# Altium PCB Board.PcbDoc
Units mil, origin at the board's own origin, x right, y up, seen from the top; angles counter-clockwise.
Board outline 1850.39 x 1909.45 mil, 4 copper layers (Top Layer, GND Plane 1, GND Plane 2, Bottom Layer), stack 23.756 mil thick; 77 components, 59 nets, 282 pads, 180 vias.
Unrouted connection lines stored in the file: 9.
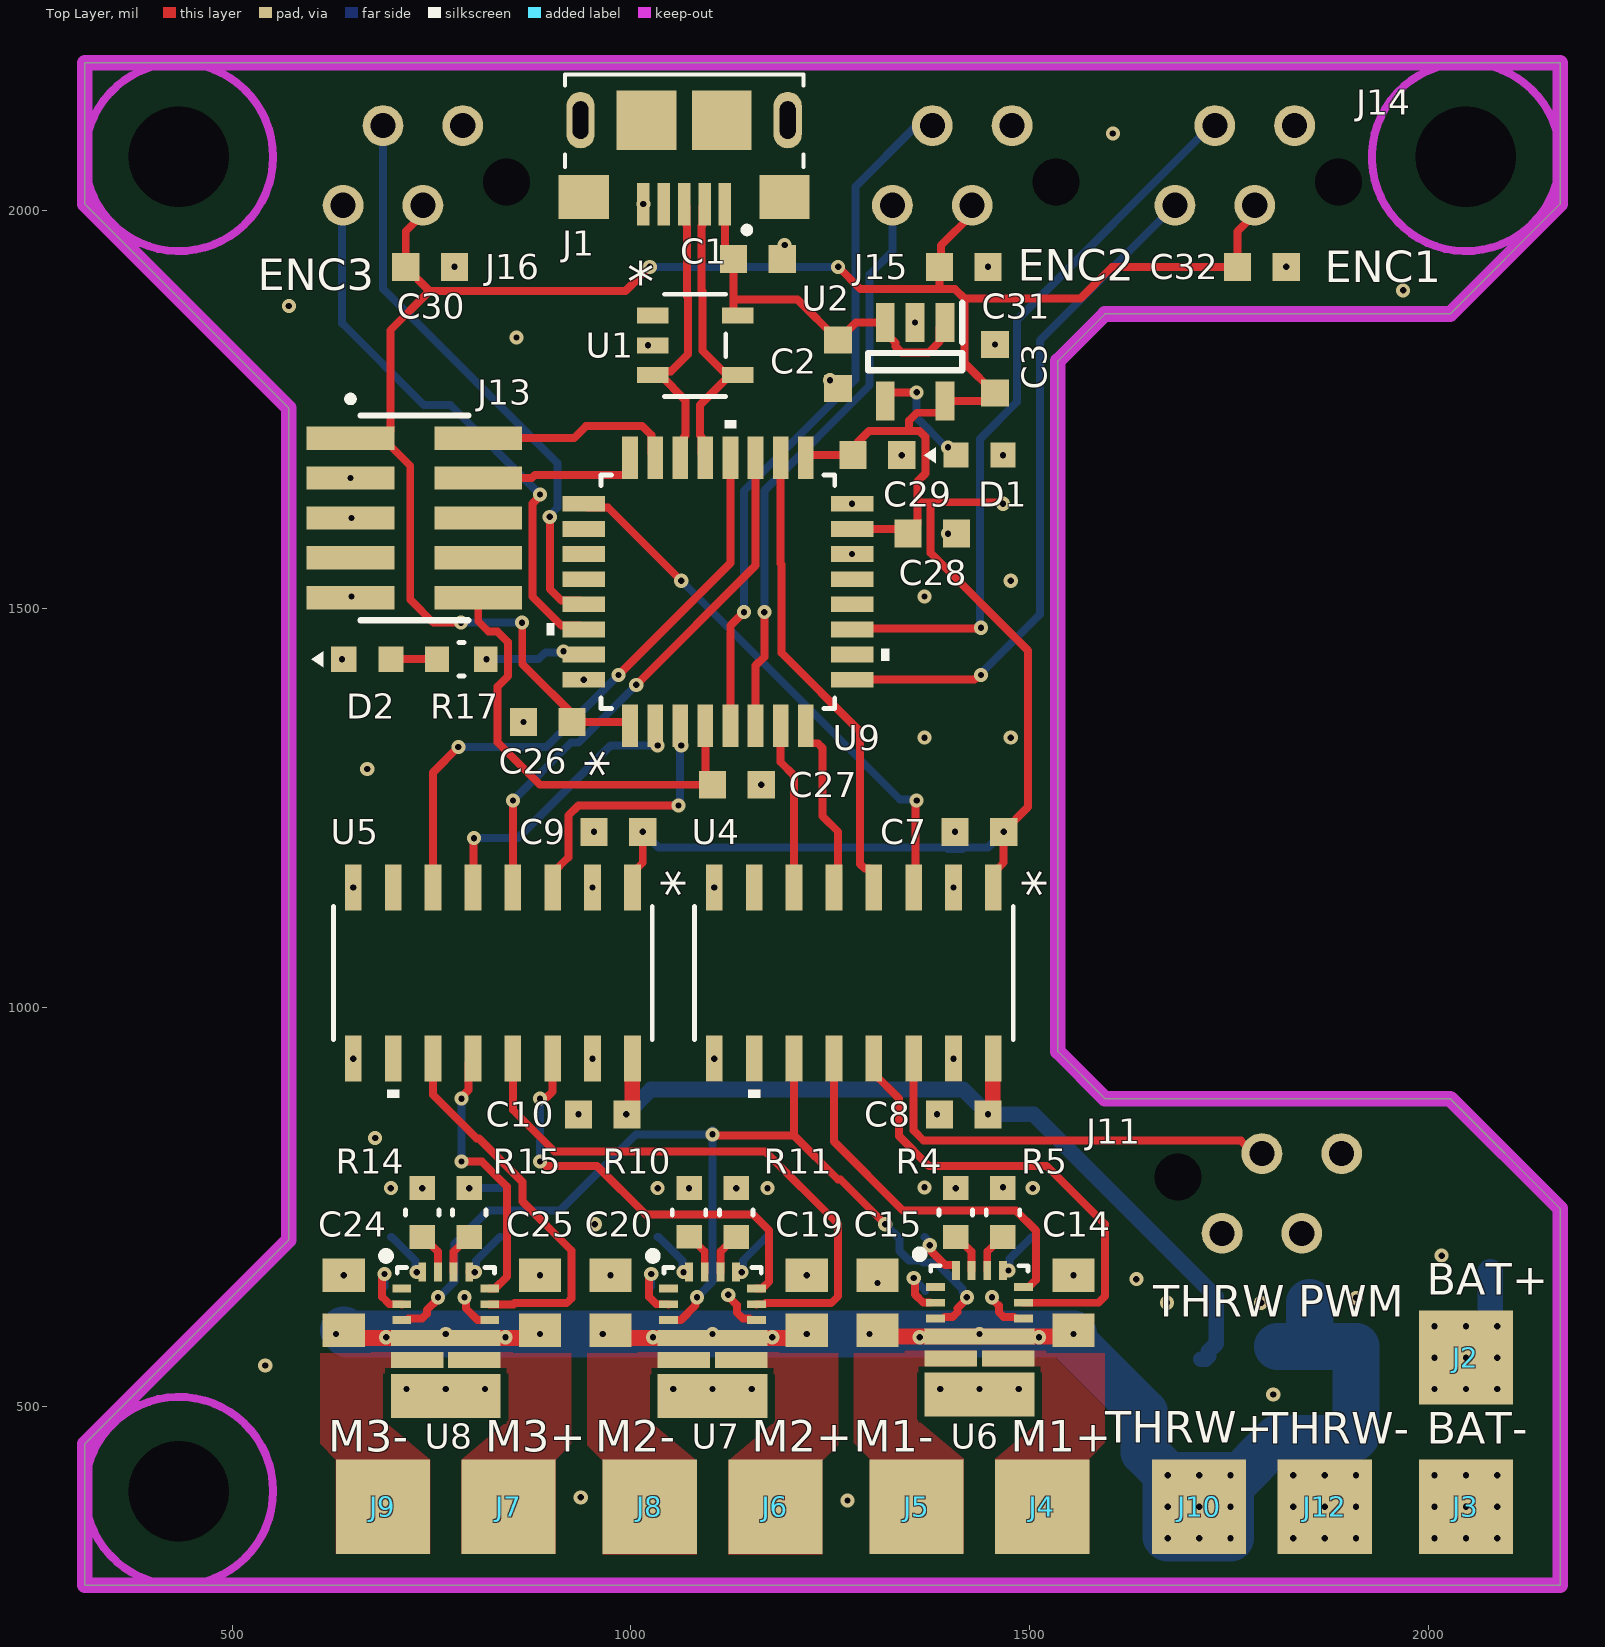
[diagram p0: Top Layer view]
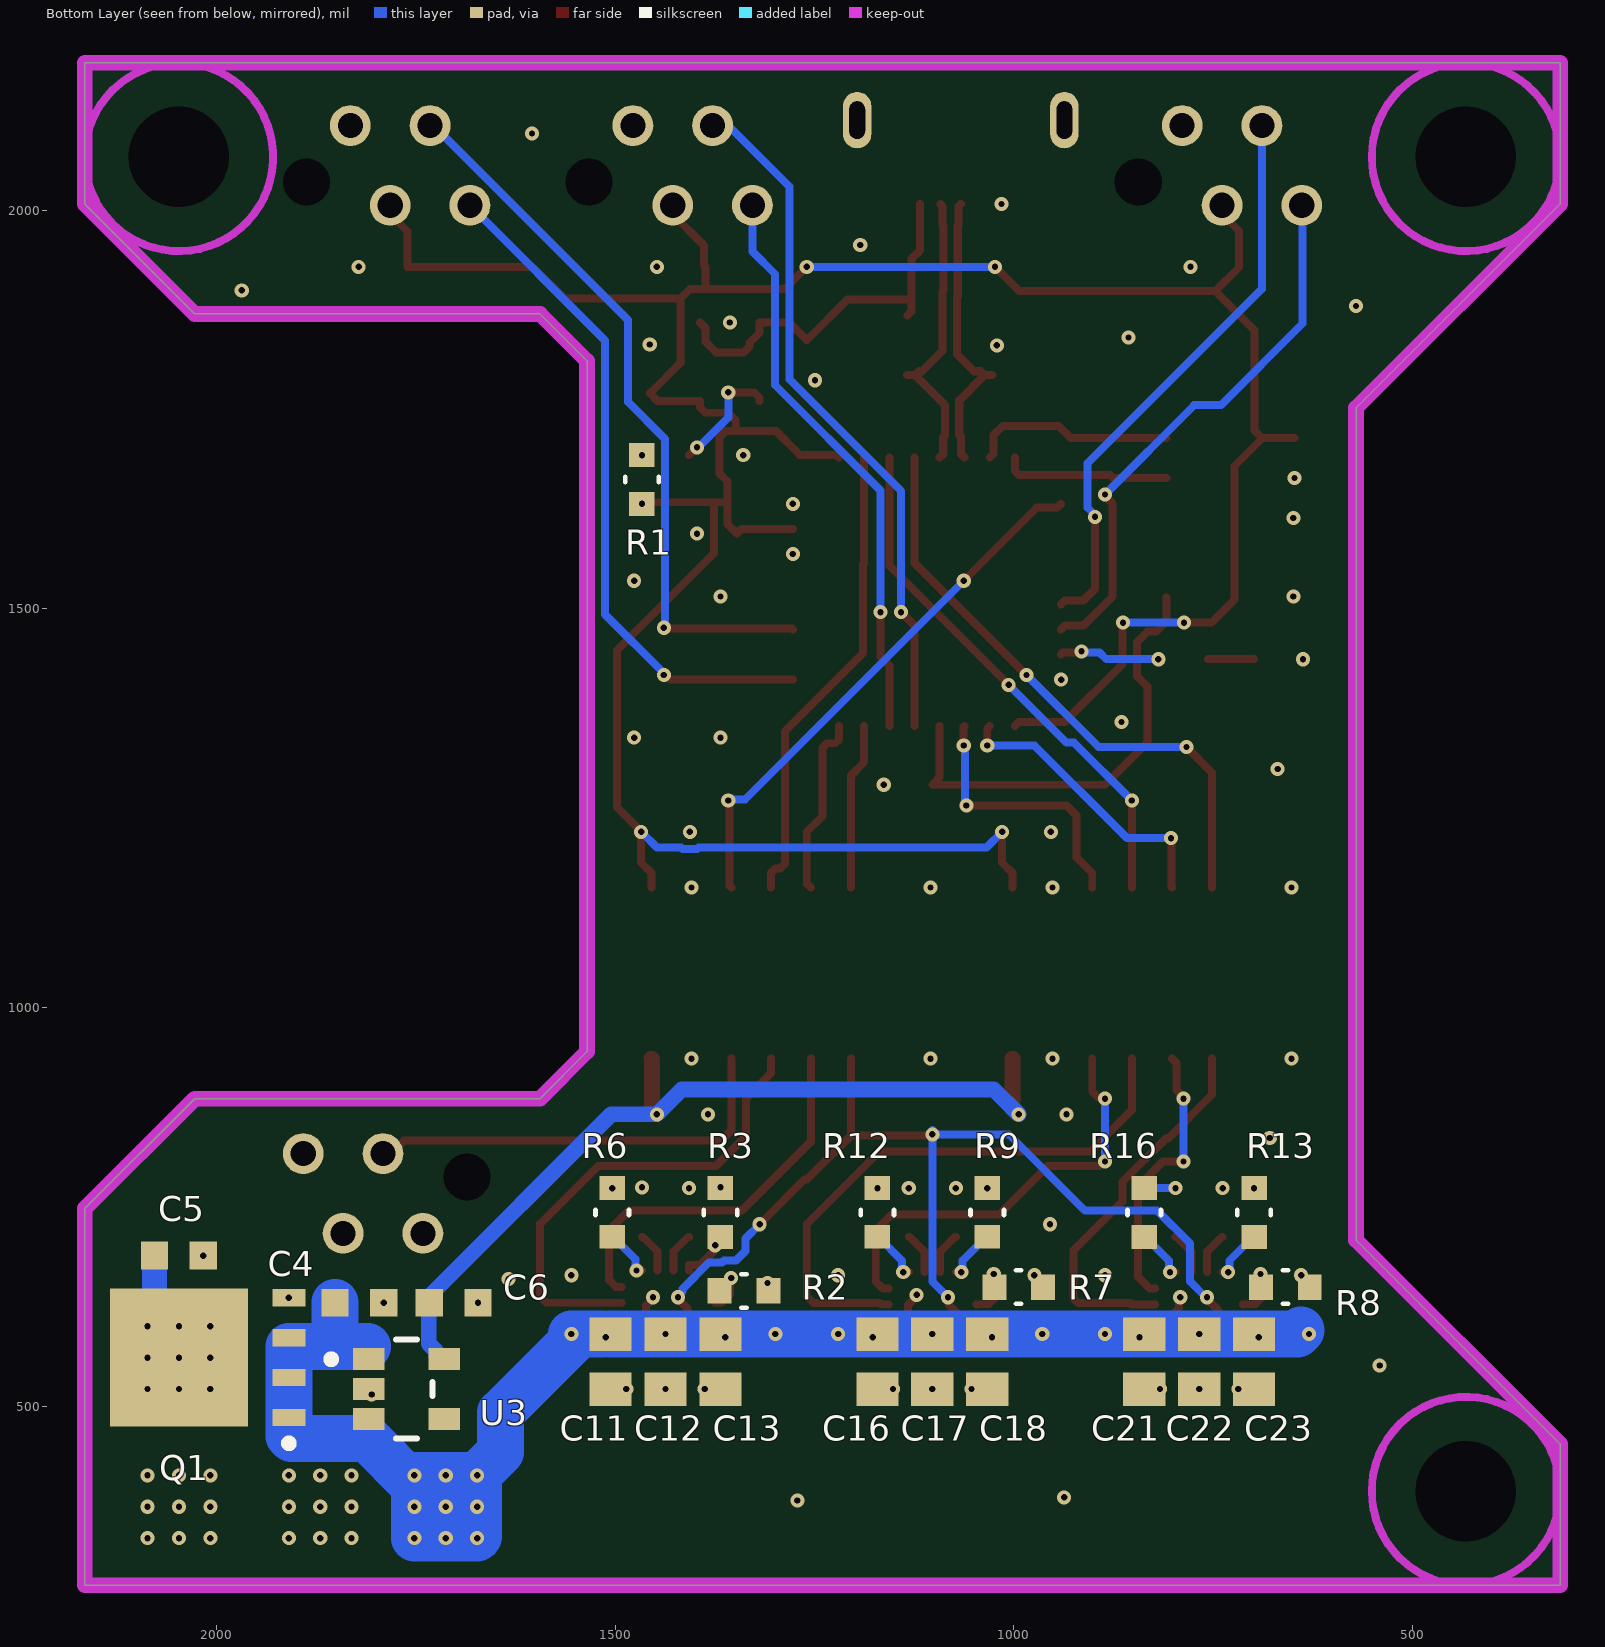
[diagram p1: Bottom Layer view, seen from below]
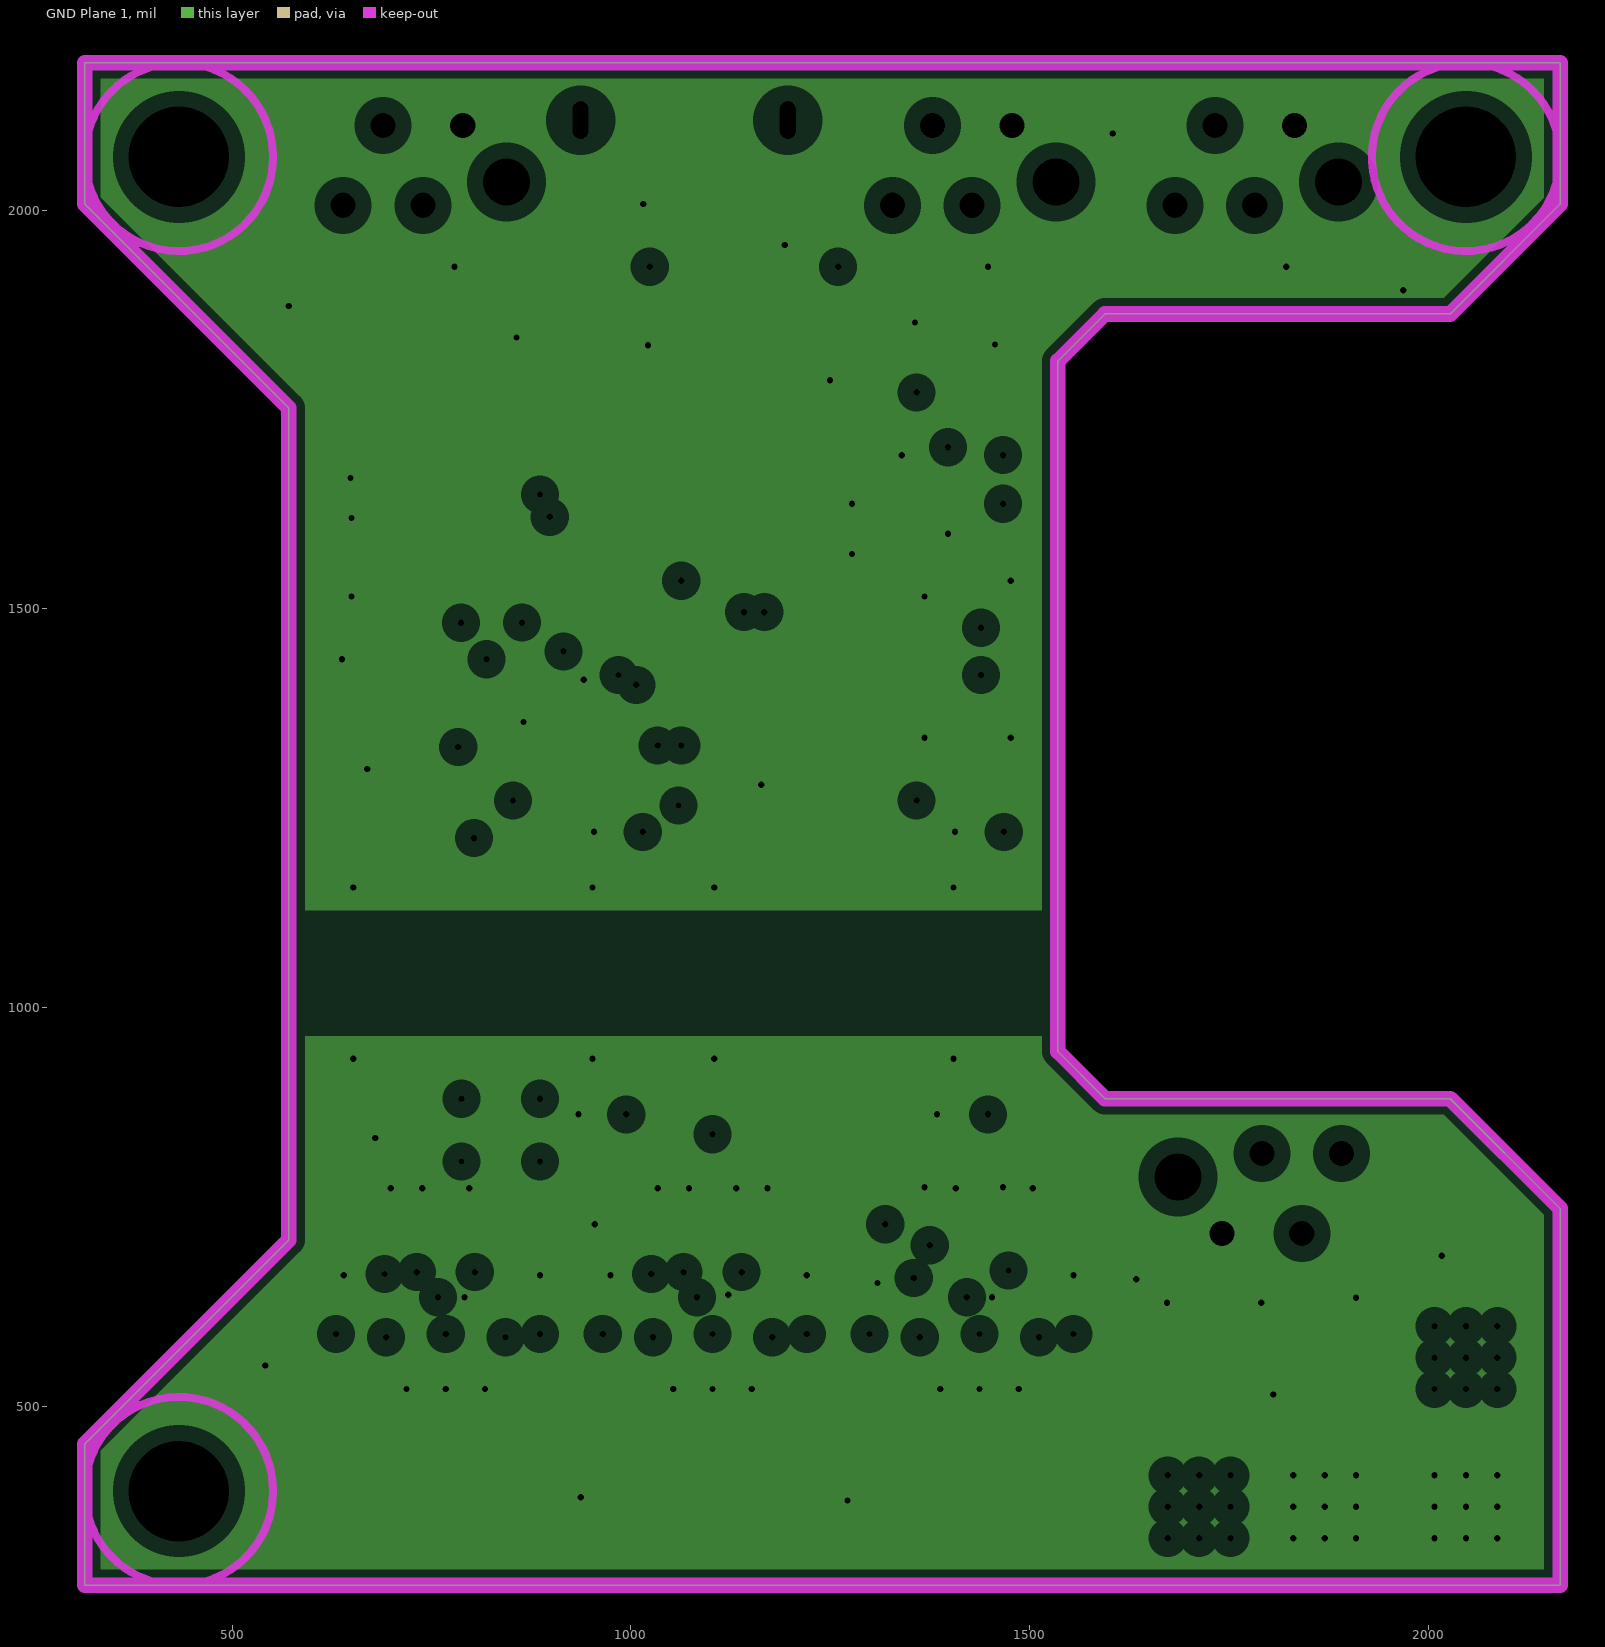
[diagram p2: GND Plane 1, clearances drawn from the general rule]
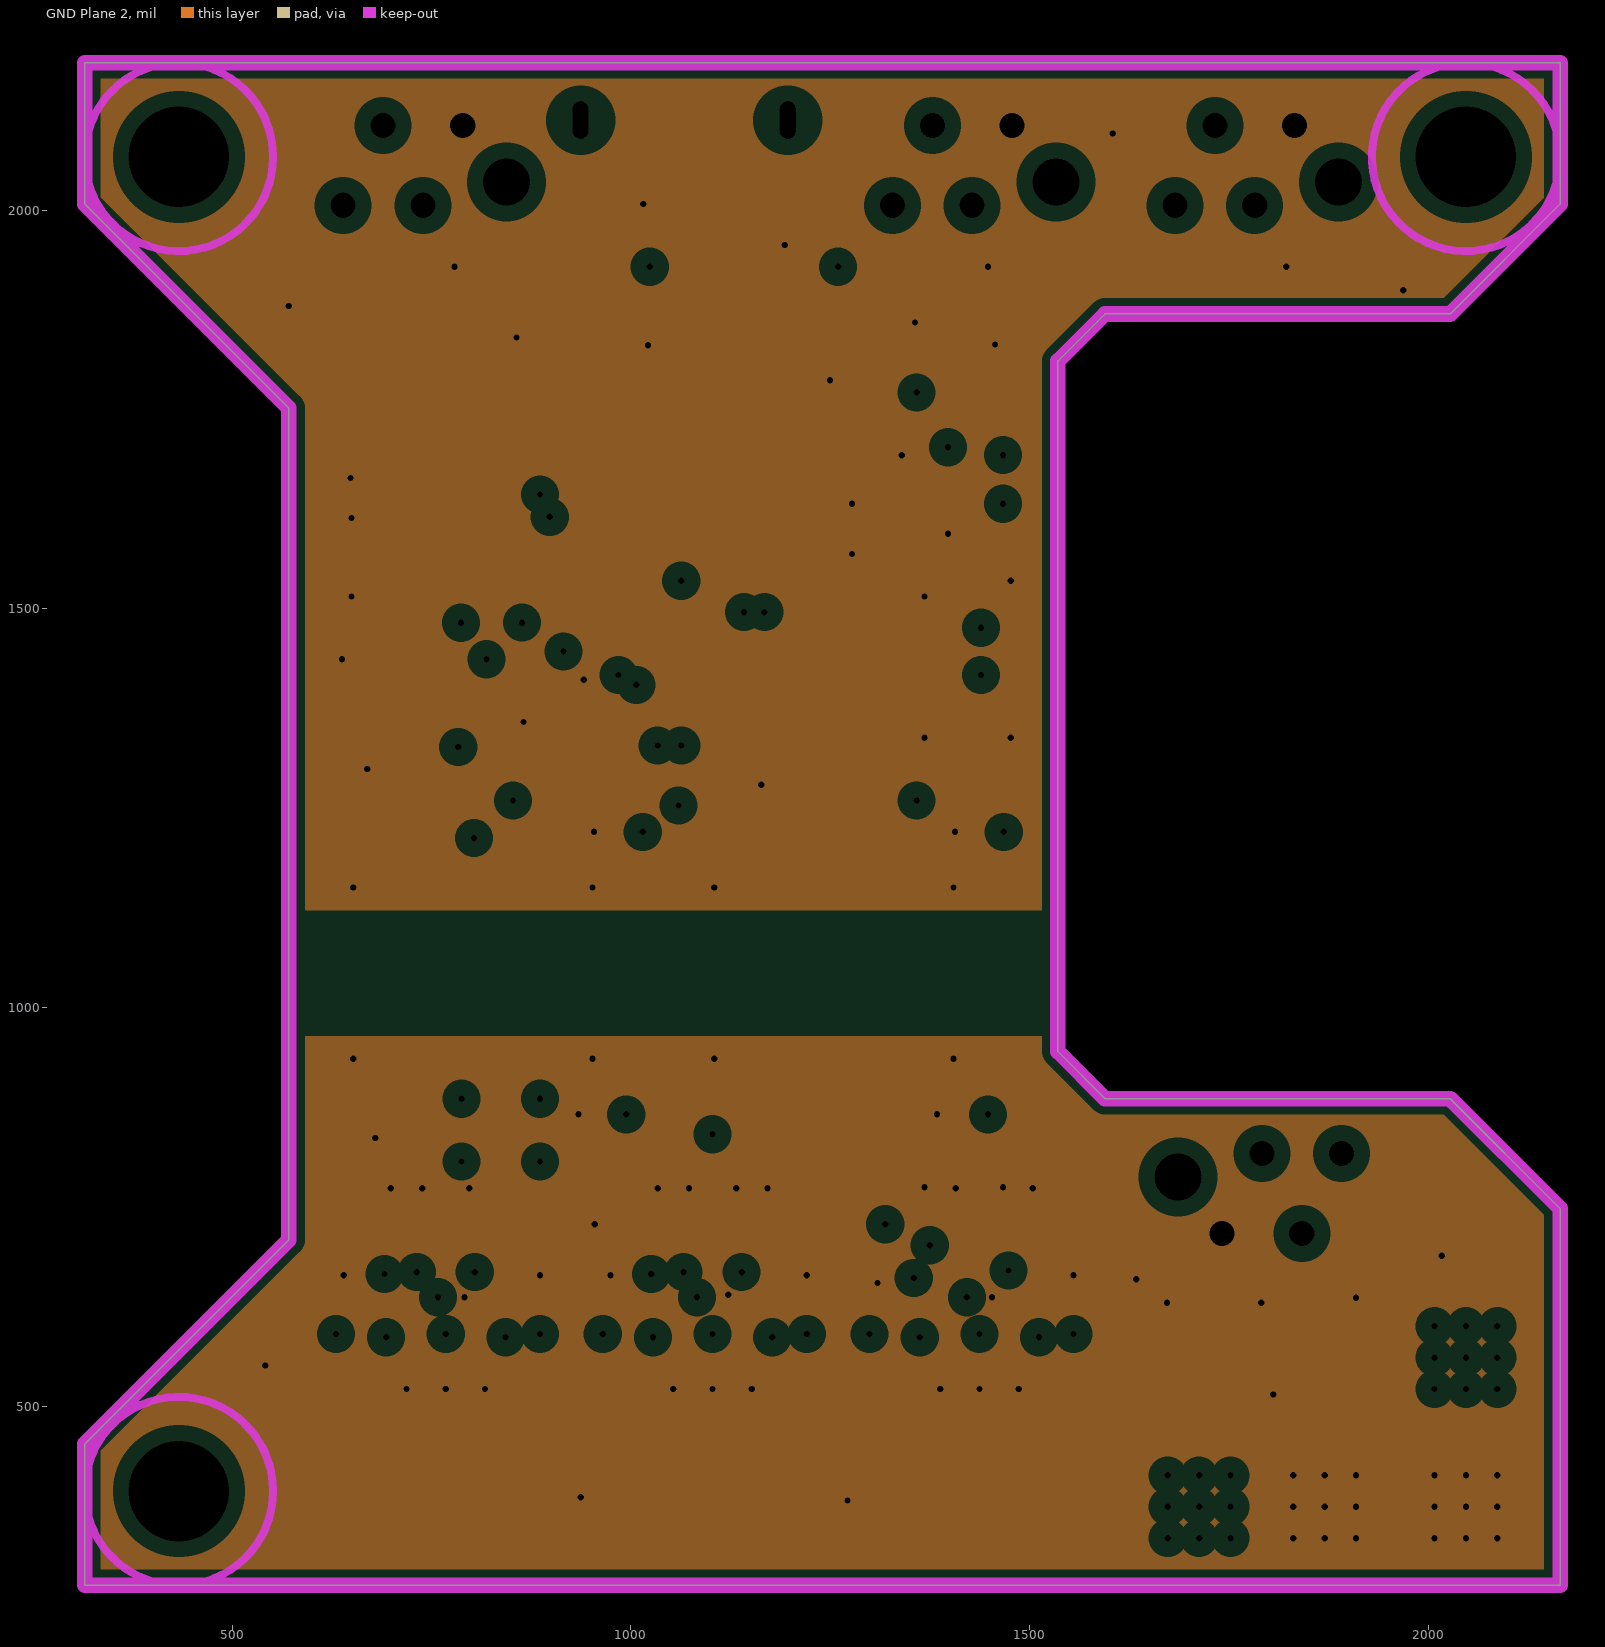
[diagram p3: GND Plane 2, clearances drawn from the general rule]
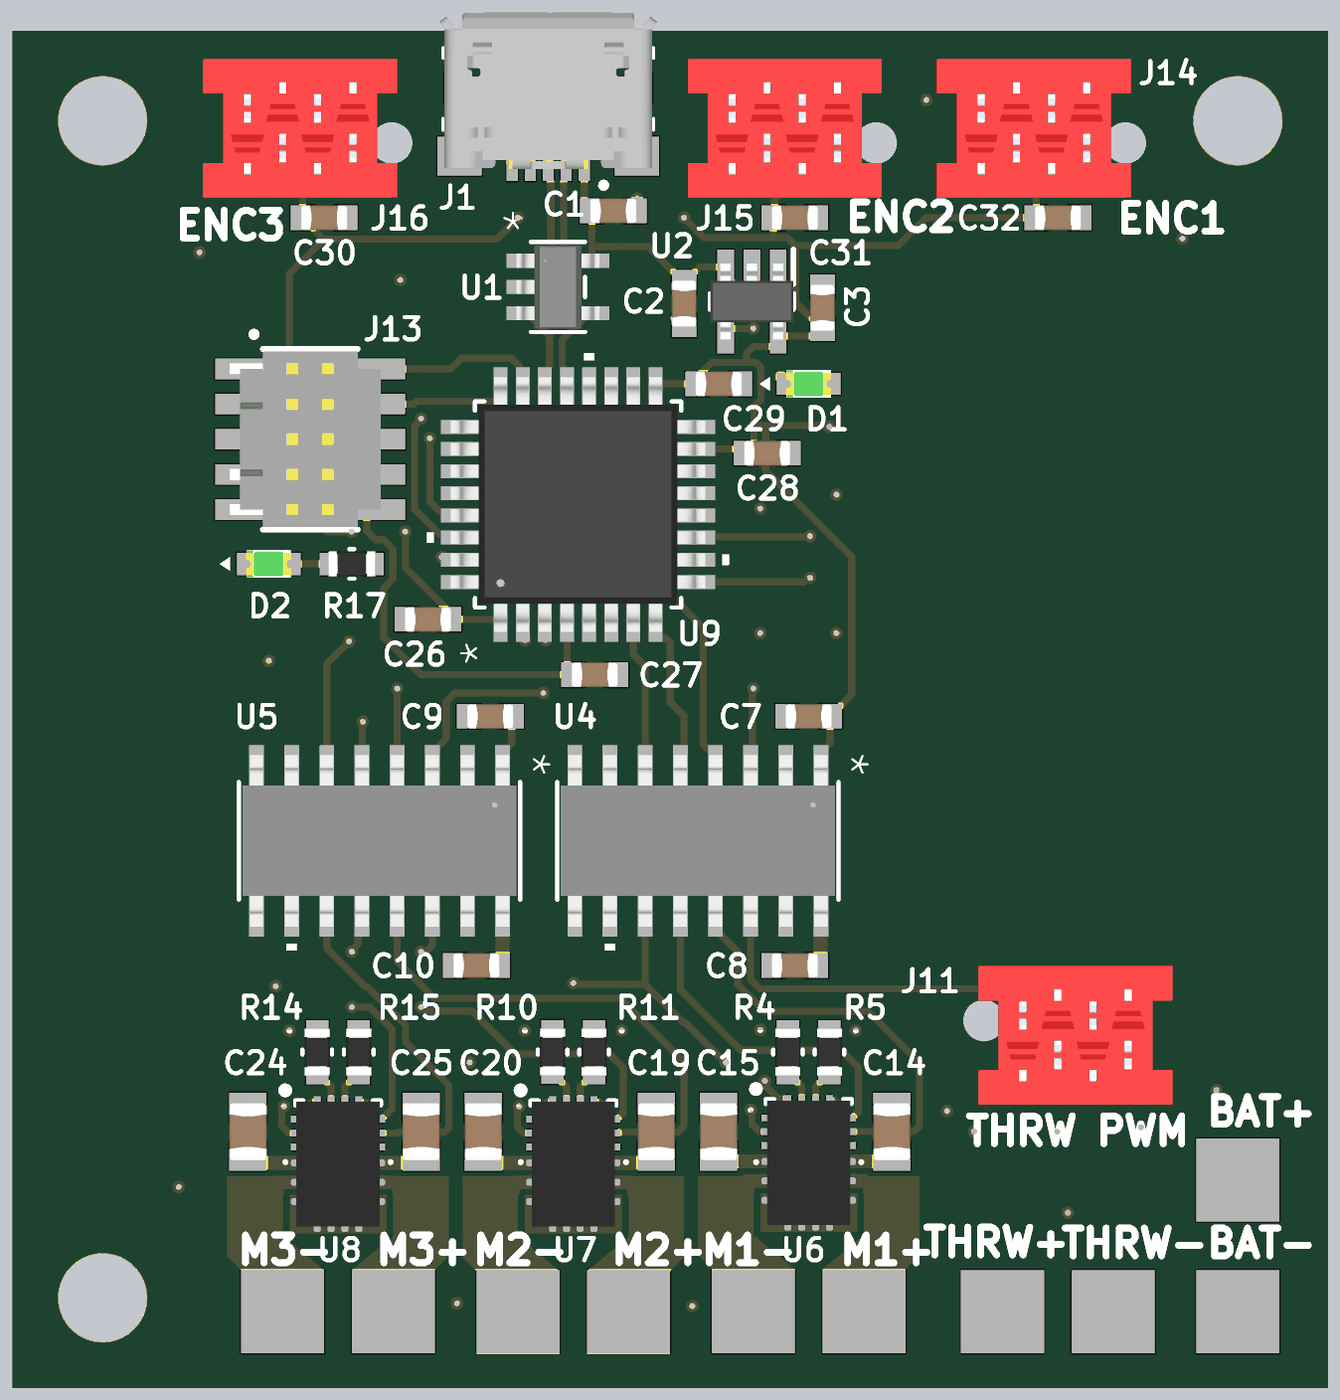
[diagram p4: 3D render of the assembled board from above, using the file's embedded part models]
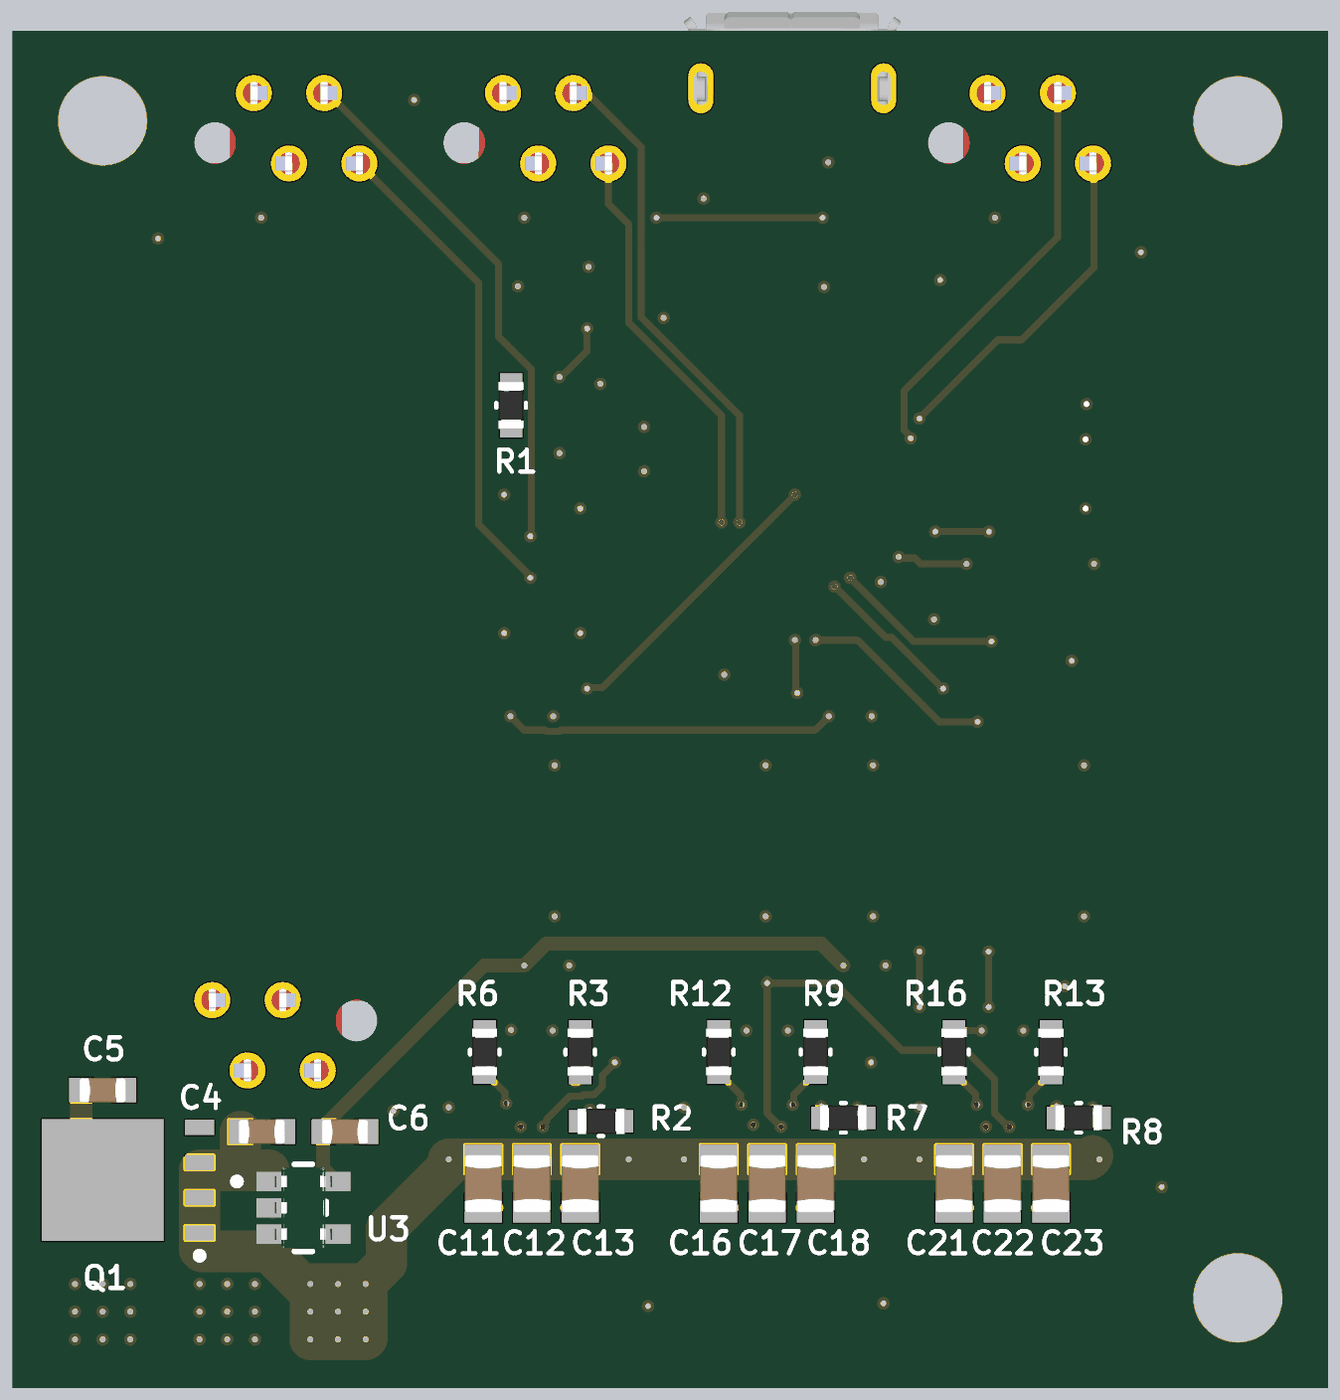
[diagram p5: 3D render of the assembled board from below, using the file's embedded part models]

## Layer stack, top to bottom
Top Solder: solder mask 0.4, Solder Resist, Dk 3.5
Top Layer: signal copper 1.4
Dielectric 2: prepreg 2.8, PP-006, Dk 4.1
GND Plane 1: plane copper 1.378, net (Multiple Nets)
Dielectric 1: dielectric 12.6, FR-4, Dk 4.8
GND Plane 2: plane copper 1.378, net (Multiple Nets)
Dielectric 3: prepreg 2.8, PP-006, Dk 4.1
Bottom Layer: signal copper 1.4
Bottom Solder: solder mask 0.4, Solder Resist, Dk 3.5

## Board outline
314.96,275.59 314.96,452.76 570.87,708.66 570.87,1751.97 314.96,2007.87 314.96,2185.04 2165.35,2185.04 2165.35,2007.87 2027.56,1870.08 1594.49,1870.08 1535.43,1811.02 1535.43,944.88 1594.49,885.83 2027.56,885.83 2165.35,748.03 2165.35,275.59

## Design rules (kind name [scope] priority, off if disabled: settings)
BoardOutlineClearance [All] p1: gap=7.87 ignorepadtopadclearanceinfootprint=FALSE except(0: Arc-SplitContinuation Track-SplitContinuation SMDPad-SplitContinuation THPad-SplitContinuation Via-SplitContinuation Fill-SplitContinuation Poly-SplitContinuation Region-SplitContinuation Text-SplitContinuation)
Clearance [All] p1: gap=7.87 ignorepadtopadclearanceinfootprint=TRUE except(0: Arc-Hole Track-Hole SMDPad-Hole THPad-Hole Via-Hole Fill-Hole Poly-Hole Region-Hole Text-Hole)
DiffPairsRouting DiffPairsRoutingUSB [InDifferentialPairClass('USB')] p1: maxlimit=7.87 minlimit=7.87 mostfreqgap=7.87 toplayer_minwidth=10.24 toplayer_maxwidth=10.24 toplayer_prefwidth=10.24 bottomlayer_minwidth=10.24 bottomlayer_maxwidth=10.24 bottomlayer_prefwidth=10.24 maxuncoupledlength=500
HoleSize [All] p1: absolutevalues=TRUE maxlimit=196.85 minlimit=1 maxpercent=80.000 minpercent=20.000
HoleToHoleClearance [All] p1: gap=7.87 allowstackedmicrovias=TRUE
MinimumSolderMaskSliver [All] p1: minsoldermaskwidth=3.94
PlaneClearance [All] p1: clearance=20
PlaneConnect PlaneConnectVia [IsVia] p1: planeconnectstyle=Direct reliefexpansion=20 reliefentries=4 reliefconductorwidth=10 reliefairgap=10
PlaneConnect [All] p2: planeconnectstyle=Relief reliefexpansion=20 reliefentries=4 reliefconductorwidth=10 reliefairgap=10
PolygonConnect PolygonConnectVia [IsVia] p1: connectstyle=Direct reliefconductorwidth=10 reliefentries=4 polygonreliefangle="90 Angle" airgapwidth=10
PolygonConnect MotorConnect [InNetClass('Motor pads')] p2: connectstyle=Direct reliefconductorwidth=10 reliefentries=4 polygonreliefangle="90 Angle" airgapwidth=10
PolygonConnect [All] p3: connectstyle=Relief reliefconductorwidth=10 reliefentries=4 polygonreliefangle="90 Angle" airgapwidth=10
RoutingVias [All] p1: holewidth=7.87 width=17.72 viastyle="Through Hole" minholewidth=7.87 minwidth=17.72 maxholewidth=118.11 maxwidth=196.85
SilkToSilkClearance [All] p1: silktosilkclearance=7.87
SilkToSolderMaskClearance [IsPad] p1: minsilkscreentomaskgap=3.94 clearancetoexposedcopper=TRUE
SolderMaskExpansion SolderMaskExpansionVia [IsVia] p1: expansion=4 istentingtop=TRUE
SolderMaskExpansion [All] p2: expansion=1.97 istentingtop=FALSE
Width [All] p1: maxlimit=118.11 minlimit=10 preferedwidth=10 minimp=50.000000 maximp=50.000000 favimp=50.000000
22 further rules are at their usual default settings.

## Classes and differential pairs
net class "Motor pads": NetJ4_1 NetJ5_1 NetJ6_1 NetJ7_1 NetJ8_1 NetJ9_1
differential pair class USB: USB_Data
component class U_MotorControl: C11 C12 C13 C14 C15 C16 C17 C18 C19 C20 C21 C22 C23 C24 C25 J4 J5 J6 J7 J8 J9 J10 J11 J12 R2 R3 R4 R5 R6 R7 R8 R9 R10 R11 R12 R13 R14 R15 R16 U6 U7 U8
component class U_MicroController: C26 C27 C28 C29 C30 C31 C32 D2 J13 J14 J15 J16 R17 U9
component class Mainboard: C1 C2 C3 C4 C5 C6 C7 C8 C9 C10 D1 J1 J2 J3 Q1 R1 U1 U2 U3 U4 U5
differential pair USB_Data: +USB_Data_P -USB_Data_N

## Components (designator, comment, footprint, x,y, rotation, side; value= is the part's Value field where it differs from the comment)
C1 "MLCC" CAP_0603 1159.2,1938.92 r180 top value="0.1 µF"
C2 "MLCC" CAP_0603 1259.84,1807.09 r90 top value="1 µF"
C3 "MLCC" CAP_0603 1456.69,1801.18 r270 top value="1 µF"
C4 "MLCC" CAP_0603 1820.87,629.92 r0 bottom value="1 µF"
C5 "MLCC" CAP_0603 2047.24,688.98 r0 bottom value="0.1 µF"
C6 "MLCC" CAP_0603 1702.76,629.92 r0 bottom value="1 µF"
C7 "MLCC" CAP_0603 1437.01,1220.47 r180 top value="0.1 µF"
C8 "MLCC" CAP_0603 1417.32,866.14 r0 top value="0.1 µF"
C9 "MLCC" CAP_0603 984.25,1220.47 r180 top value="0.1 µF"
C10 "MLCC" CAP_0603 964.57,866.14 r0 top value="0.1 µF"
C11 "MLCC" CAP_0805 1505.91,556.05 r90 bottom value="10 µF"
C12 "MLCC" CAP_0805 1437.01,556.05 r90 bottom value="10 µF"
C13 "MLCC" CAP_0805 1368.11,556.05 r90 bottom value="10 µF"
C14 "MLCC" CAP_0805 1555.12,629.92 r270 top value="10 µF"
C15 "MLCC" CAP_0805 1309.06,629.92 r270 top value="10 µF"
C16 "MLCC" CAP_0805 1171.26,556.05 r90 bottom value="10 µF"
C17 "MLCC" CAP_0805 1102.36,556.05 r90 bottom value="10 µF"
C18 "MLCC" CAP_0805 1033.46,556.05 r90 bottom value="10 µF"
C19 "MLCC" CAP_0805 1220.47,629.92 r270 top value="10 µF"
C20 "MLCC" CAP_0805 974.41,629.92 r270 top value="10 µF"
C21 "MLCC" CAP_0805 836.61,556.05 r90 bottom value="10 µF"
C22 "MLCC" CAP_0805 767.72,556.05 r90 bottom value="10 µF"
C23 "MLCC" CAP_0805 698.82,556.05 r90 bottom value="10 µF"
C24 "MLCC" CAP_0805 639.76,629.92 r270 top value="10 µF"
C25 "MLCC" CAP_0805 885.83,629.92 r270 top value="10 µF"
C26 "MLCC" CAP_0603 895.67,1358.27 r0 top value="0.1 µF"
C27 "MLCC" CAP_0603 1132.86,1279.53 r0 top value="0.1 µF"
C28 "MLCC" CAP_0603 1377.95,1594.49 r0 top value="0.1 µF"
C29 "MLCC" CAP_0603 1309.06,1692.91 r180 top value="0.1 µF"
C30 "MLCC" CAP_0603 748.03,1929.13 r0 top value="0.1 µF"
C31 "MLCC" CAP_0603 1417.32,1929.13 r0 top value="0.1 µF"
C32 "MLCC" CAP_0603 1791.34,1929.13 r0 top value="0.1 µF"
D1 "LED" 0603_GREEN 1437.01,1692.91 r180 top
D2 "LED" 0603_GREEN 669.29,1437.01 r180 top
J1 "10118193-0001LF" FCI_10118193-0001LF 1066.68,2113.13 r180 top
J2 "Generic Power Pad" "New footprint 1" 2047.24,561.02 r0 top
J3 "Generic Power Pad" "New footprint 1" 2047.24,374.02 r0 top
J4 "Generic Power Pad" "New footprint 1" 1515.75,374.02 r0 top
J5 "Generic Power Pad" "New footprint 1" 1358.27,374.02 r0 top
J6 "Generic Power Pad" "New footprint 1" 1181.1,374.02 r0 top
J7 "Generic Power Pad" "New footprint 1" 846.46,374.02 r0 top
J8 "Generic Power Pad" "New footprint 1" 1023.62,374.02 r90 top
J9 "Generic Power Pad" "New footprint 1" 688.98,374.02 r90 top
J10 "Generic Power Pad" "New footprint 1" 1712.6,374.02 r0 top
J11 "HEADER-4" MICRO-MATCH-FOB-04 1741.34,716.93 r180 top
J12 "Generic Power Pad" "New footprint 1" 1870.08,374.02 r0 top
J13 "FTSH-105-XX-X-DV" SAMTEC_FTSH-105-XX-X-DV 728.35,1614.17 r270 top
J14 "HEADER-4" MICRO-MATCH-FOB-04 1832.28,2106.3 r0 top
J15 "HEADER-4" MICRO-MATCH-FOB-04 1477.95,2106.3 r0 top
J16 "HEADER-4" MICRO-MATCH-FOB-04 788.98,2106.3 r0 top
Q1 "BUK6Y10-30P" NXP-SOT669_N 2011.81,561.02 r0 bottom
R1 "RES" RC0603N 1466.54,1662.41 r270 bottom value=1K
R2 "RES" RC0603N 1338.58,644.63 r180 bottom value=3K3
R3 "RES" RC0603N 1368.11,743.06 r270 bottom value=0
R4 "RES" RC0603N 1407.48,743.06 r270 top value=47K
R5 "RES" RC0603N 1466.54,743.06 r270 top value=0
R6 "RES" RC0603N 1503.94,743.11 r270 bottom value=0
R7 "RES" RC0603N 994.09,649.61 r180 bottom value=3K3
R8 "RES" RC0603N 659.45,649.61 r180 bottom value=3K3
R9 "RES" RC0603N 1033.46,743.11 r270 bottom value=0
R10 "RES" RC0603N 1072.83,743.11 r270 top value=47K
R11 "RES" RC0603N 1131.89,743.06 r270 top value=0
R12 "RES" RC0603N 1171.26,743.11 r270 bottom value=0
R13 "RES" RC0603N 698.82,743.06 r270 bottom value=0
R14 "RES" RC0603N 738.19,743.06 r270 top value=47K
R15 "RES" RC0603N 797.24,743.06 r270 top value=0
R16 "RES" RC0603N 836.61,743.06 r270 bottom value=0
R17 "RES" RC0603N 787.4,1437.01 r0 top value=1K
U1 "CM1223-02SO" SOT23-5_3X1P7_ONS 1080.46,1830.65 r0 top
U2 "NCP164CSN330T1G" SOT95P275X110-5N 1356.3,1810.09 r270 top
U3 "NCV8730ASN500T1G" FP-483-MFG 1761.81,521.65 r180 bottom
U4 "MAX14930DASE+" 21-0041_S16+1_MXM 1279.53,1043.31 r270 top
U5 "MAX14930DASE+" 21-0041_S16+1_MXM 826.77,1043.31 r270 top
U6 "PDRV8243HRXYQ1" RXY0014A-MFG 1437.01,585.58 r0 top
U7 "PDRV8243HRXYQ1" RXY0014A-MFG 1102.36,583.61 r0 top
U8 "PDRV8243HRXYQ1" RXY0014A-MFG 767.72,583.61 r0 top
U9 "STM32G441KBT3" LQFP32_7X7_STM 1109.06,1521.6 r90 top

## Footprints (in the part's own frame and the unit in brackets; to place one, negate y for a bottom-side part, rotate by r counter-clockwise, add the part's x,y. Pads: shape width x height; smd on the part's side, far side on the other; paste and mask are expansions set on the pad)
21-0041_S16+1_MXM [mil]
  rect 57.55x21 smd paste+0 mask+0: 1(-107.27,175) 2(-107.27,125) 3(-107.27,75) 4(-107.27,25) 5(-107.27,-25) 6(-107.27,-75) 7(-107.27,-125) 8(-107.27,-175) 9(107.27,-175) 10(107.27,-125) 11(107.27,-75) 12(107.27,-25) 13(107.27,25) 14(107.27,75) 15(107.27,125) 16(107.27,175)
  silkscreen extent -84,-200 156,200, body extent -122,-195 122,195, height 69
0603_GREEN [mm]
  rect 0.8x0.8 smd: 1(-0.75,0) 2(0.75,0)
  silkscreen extent 1.4,-0.25 1.78,0.25, body extent -0.81,-0.5 0.81,0.5, height 0.88
CAP_0603 [mil]
  rect 34x35 smd: 1(-30.5,0) 2(30.5,0)
  body extent -33,-18 33,18, height 35
CAP_0805 [mil]
  rect 42x53 smd: 1(-34.5,0) 2(34.5,0)
  body extent -41,-27 41,27, height 53
FCI_10118193-0001LF [mm]
  rect 0.4x1.35 smd: 1(-1.3,2.675) 2(-0.65,2.675) 3(0,2.675) 4(0.65,2.675) 5(1.3,2.675)
  rect 1.6x1.4 smd: S1(-3.2,2.45) S2(3.2,2.45)
  rect 1.9x1.9 smd: S3(1.2,0) S4(-1.2,0)
  oval 0.9x1.8 hole 0.5 slot 1.2 at 90 deg: S5(-3.3,0) S6(3.3,0)
  silkscreen extent -3.8,-1.45 3.8,3.6, body extent -3.93,-2.74 3.93,2.92, height 2.82
FP-483-MFG [mm]
  rect 1x0.7 smd paste+0 mask+0: 1(-1.2,0.95) 2(-1.2,0) 3(-1.2,-0.95) 4(1.2,-0.95) 5(1.2,0.95)
  silkscreen extent -2.53,-1.58 0.82,1.58, body extent -1.4,-1.45 1.4,1.45, height 1
LQFP32_7X7_STM [mil]
  rect 53.5x19.72 smd paste+0 mask+0: 1(-168.25,110.24) 2(-168.25,78.74) 3(-168.25,47.24) 4(-168.25,15.75) 5(-168.25,-15.75) 6(-168.25,-47.24) 7(-168.25,-78.74) 8(-168.25,-110.24) 17(168.25,-110.24) 18(168.25,-78.74) 19(168.25,-47.24) 20(168.25,-15.75) 21(168.25,15.75) 22(168.25,47.24) 23(168.25,78.74) 24(168.25,110.24)
  rect 19.72x53.5 smd paste+0 mask+0: 9(-110.24,-168.25) 10(-78.74,-168.25) 11(-47.24,-168.25) 12(-15.75,-168.25) 13(15.75,-168.25) 14(47.24,-168.25) 15(78.74,-168.25) 16(110.24,-168.25) 25(110.24,168.25) 26(78.74,168.25) 27(47.24,168.25) 28(15.75,168.25) 29(-15.75,168.25) 30(-47.24,168.25) 31(-78.74,168.25) 32(-110.24,168.25)
  silkscreen extent -146,-215 215,215, body extent -181,-181 181,181, height 63
MICRO-MATCH-FOB-04 [mm]
  round 1.3 hole 0.8: 1(0,0) 2(-1.27,-2.54) 3(-2.54,0) 4(-3.81,-2.54)
  round 0 hole 1.5 unplated: drill(1.4,-1.8)
  body extent -5.41,-3.77 1.6,1.23, height 4
"New footprint 1" [mm]
  rect 3x3 smd: 1(0,0)
NXP-SOT669_N [mm] "DPAK, 4-Leads, Body 5x4.1mm, Pitch 1.27mm, IPC Medium Density"
  rect 1.05x0.55 smd: 1(-2.6,1.905) 2(-2.6,0.635) 3(-2.6,-0.635) 4(-2.6,-1.905)
  rect 4.4x4.4 smd: 5(0.9,0)
  silkscreen extent -2.72,2.61 -2.47,2.85, body extent -1.9,-2.5 2.2,2.5, height 1.2
RC0603N [mil]
  rect 30x32 smd: 1(-30.5,0) 2(30.5,0)
  silkscreen extent -3,-21 3,21, body extent -33,-18 33,18, height 22
RXY0014A-MFG [mm]
  rect 0.6x0.25 smd paste+0 mask-0.292: 1(-1.4,1.625) 2(-1.4,1.125) 3(-1.4,0.625) 8(1.4,0.625) 9(1.4,1.125) 10(1.4,1.625)
  rect 3.5x0.5 smd paste-1.737 mask-1.74: 4(0,0.05)
  rect 1.675x0.5 smd paste-0.825 mask-0.826: 5(-0.913,-0.65) 7(0.913,-0.65)
  rect 3.5x1.4 smd paste-1.737 mask-1.74: 6(0,-1.8)
  rect 0.25x0.6 smd paste+0 mask-0.292: 11(0.75,2.15) 12(0.25,2.15) 13(-0.25,2.15) 14(-0.75,2.15)
  silkscreen extent -2.03,2.12 1.55,2.79, body extent -1.5,-2.25 1.5,2.25, height 1
SAMTEC_FTSH-105-XX-X-DV [mm]
  rect 0.74x2.79 smd: 01(-2.54,-2.035) 02(-2.54,2.035) 03(-1.27,-2.035) 04(-1.27,2.035) 05(0,-2.035) 06(0,2.035) 07(1.27,-2.035) 08(1.27,2.035) 09(2.54,-2.035) 10(2.54,2.035)
  silkscreen extent -3.89,-2.13 3.26,1.72, body extent -3.18,-2.92 3.18,2.92, height 5.71
SOT23-5_3X1P7_ONS [mil]
  rect 39.5x20 smd paste+0 mask+0: 1(-53.25,37.4) 2(-53.25,0) 3(-53.25,-37.4) 4(53.25,-37.4) 5(53.25,37.4)
  silkscreen extent -38,-64 38,64, body extent -59,-59 59,59, height 51
SOT95P275X110-5N [mm]
  rect 1.25x0.6 smd: 1(-1.25,0.95) 2(-1.25,0) 3(-1.25,-0.95) 4(1.25,-0.95) 5(1.25,0.95)
  silkscreen extent -1.88,-1.5 0.28,1.5, body extent -1.38,-1.5 1.38,1.5, height 1.1

## Part data
C1 C2 C3 C4 C5 C6 C7 C8 C9 C10 C11 C12 C13 C14 C15 C16 C17 C18 C19 C20 C21 C22 C23 C24 C25 C26 C27 C28 C29 C30 C31 C32: library part CMP-059-000002-1, "Multilayer Ceramic Capacitors", Tolerance=10%, VoltageRatingDC=5V, Component Type=Standard, Design Item ID=MLCC, Pin Count=2, Source=Capacitors.SchLib
D1 D2: library part CMP-063-000000-1, "LED Emitters", ForwardVoltage=2V, Component Type=Standard, Design Item ID=LED, Pin Count=2, Source=Leds.SchLib
J1: library part CMP-002-000000-4, "USB - micro B USB 2.0 Receptacle Connector 5 Position Surface Mount, Right Angle; Through Hole", Package=None, Availability=Unavailable, Component Type=Standard, Design Item ID=10118193-0001LF, MF="Amphenol ICC", MP=10118193-0001LF, Pin Count=11, price=None, SnapEDA_Link=https://www.snapeda.com/parts/10118193-0001LF/Amphenol%20FCI/view-part/2758989/?ref=snap, Source=SnapEDAsch.SchLib
J2 J3 J4 J5 J6 J7 J8 J9 J10 J12: library part CMP-00002-4
J11 J14 J15 J16: library part CMP-051-000006-1, Component Type=Standard, Design Item ID=HEADER-4, Pin Count=4, Source=connectors_micromatch.SchLib
J13: library part CMP-004-000000-2, "Connector Header Surface Mount 10 position 0.050\" (1.27mm)", Package=None, Availability=Unavailable, Component Type=Standard, Design Item ID=FTSH-105-XX-X-DV, MP=FTSH-105-XX-X-DV, Pin Count=10, price=None, Source=FTSH-105-XX-X-DV.SchLib
Q1: library part CMP-011-000000-5, "P-Channel Standard Level MOSFET SOT669-5", PartNumber=BUK7Y4R4-40EX, Automotive Qualified=Y, Channel Type=N, Code_JEDEC=MO-235, Component Type=Transistor, Design Item ID=CMP-1259-00420-1, ID [max] (A)=100, IDM [max] (A)=521, Mounting Technology="Surface Mount", PackageDescription="4-Pin Plastic Single-ended Surface Mounted Package, Body 4.9 x 3.95 mm, Pitch 1.27 mm", PackageReference=SOT669, PackageVersion="13-02-27, 02/2013", Packing="Tape & Reel", Pin Count=5, Qr [typ] (nC)=18, Source="Components - 16.10.22 - 00.34.SchLib", VDS [max] (V)=40, VGSth [typ] (V)=3
R1 R2 R3 R4 R5 R6 R7 R8 R9 R10 R11 R12 R13 R14 R15 R16 R17: library part CMP-061-000001-5, "Chip Resistors", PowerRating=0.25W, Component Type=Standard, Design Item ID=RES, Pin Count=2, Source=Resistors.SchLib
U1: library part CMP-044-000002-2, "No Description Available", Mfr_Name=onsemi, Component Type=Standard, Copyright="Copyright (C) 2022 Ultra Librarian. All rights reserved.", Design Item ID=CM1223-02SO, Manufacturer_Part_Number=CM1223-02SO, Pin Count=5, RefDes=RefDes, Source=CM1223-02SO.SchLib, Type=DEV
U2: "Integrated Circuit", Manufacturer_Name=onsemi, Mouser Part Number=863-NCP164CSN330T1G, Arrow Part Number=NCP164CSN330T1G, Arrow Price/Stock=https://www.arrow.com/en/products/ncp164csn330t1g/on-semiconductor?region=nac, Datasheet Link=https://componentsearchengine.com/Datasheets/2/NCP164CSN330T1G.pdf, Height=1.1mm, Manufacturer_Part_Number=NCP164CSN330T1G, Mouser Price/Stock=https://www.mouser.co.uk/ProductDetail/onsemi/NCP164CSN330T1G?qs=xZ%2FP%252Ba9zWqbi%2FAyy5UtoRw%3D%3D
U3: "LDO Regulator TSOP-5"
U4 U5: "No Description Available", Mfr_Name="Maxim Integrated Products", Copyright="Copyright (C) 2022 Ultra Librarian. All rights reserved.", Manufacturer_Part_Number=MAX14930DASE+, RefDes=RefDes, Type=DEV
U6 U7 U8: library part CMP-030-000000-4, "No Description Available", Mfr_Name="Texas Instruments", Component Type=Standard, Copyright="Copyright (C) 2022 Ultra Librarian. All rights reserved.", Design Item ID=PDRV8243HRXYQ1, Manufacturer_Part_Number=PDRV8243HRXYQ1, Pin Count=14, RefDes=RefDes, Source=PDRV8243HRXYQ1.SchLib, Type=DEV
U9: "No Description Available", Mfr_Name=STMicroelectronics, Copyright="Copyright (C) 2022 Ultra Librarian. All rights reserved.", Manufacturer_Part_Number=STM32G441KBT3, RefDes=RefDes, Type=DEV

## Free pads (board coordinates)
  round 39.37 hole 125.98: ""(433.07,393.7) ""(433.07,2066.93) ""(2047.24,2066.93)

## Via types
v1: diameter 17.72, hole 7.87, Top Layer to Bottom Layer, tented both sides, 180 vias

## Nets (pads, with @x,y where several pads share a name; then routed paths per layer and width w, separated by ;. In a path a pad name is that pad's centre, name@x,y a point inside that pad or via, vN(x,y) a via of type N, cw(c..) or ccw(c..) an arc to the next point about the centre after c; other vN are vias at no path point)
+3V3: C3.2 C7.1 C9.1 C26.2 C28.1 C29.2 C30.1 C31.1 C32.1 J13.01 J14.2 J15.2 J16.2 R1.2 U2.5 U4.1 U5.1 U9.1 U9.15 U9.17 | length 4084.5
  Top Layer w10: J13.01 J13.01@688.58,1714.17 ; J16.2 738.98,1995.16 717.53,1973.71 C30.1 717.53,1928.63 747.41,1898.76 ; v1(786.81,1482.82) 752.12,1482.82 723.18,1511.76 723.18,1679.58 J13.01@688.58,1714.17 ; v1(863.27,1482.87) 863.65,1482.5 863.65,1431.13 936.01,1358.77 936.01,1358.27 993.97,1358.27 998.82,1353.41 U9.1 ; U5.1 1001.77,1168.85 1014.75,1181.83 v1(1014.75,1220.47) ; v1(1023.62,1929.13) 993.25,1898.76 747.41,1898.76 ; U9.17 1222.36,1692.91 1268.71,1692.91 1268.71,1693.41 1298.59,1723.29 1348.91,1723.29 ; v1(1259.84,1929.13) 1287.86,1901.12 1386.82,1901.12 ; U9.15 1341.6,1600.34 C28.1 1359.45,1606.49 1359.45,1633.86 ; J15.2 1427.95,1995.16 1388.57,1955.78 1388.57,1930.88 C31.1 1386.82,1901.12 ; U4.1 1454.53,1168.85 1467.51,1181.83 v1(1467.51,1220.47) 1467.51,1220.97 1498.11,1251.57 1498.11,1448.06 1375.91,1570.26 1375.91,1603.49 1375.91,1633.86 ; v1(1466.54,1631.91) 1464.59,1633.86 1375.91,1633.86 ; J14.2 1782.28,1995.16 1760.84,1973.71 C32.1 1603.56,1929.13 1563.66,1889.24 1418.39,1889.24 ; J13.01@688.58,1714.17 698.15,1723.74 698.15,1849.5 747.41,1898.76 ; 1348.91,1723.29 1361.89,1723.29 1369.43,1715.75 1369.43,1670.08 1359.45,1660.1 1359.45,1633.86 ; 1348.91,1723.29 1348.91,1736.26 1358.75,1746.1 1386.89,1746.1 1393.7,1752.91 U2.5 1446.89,1760.87 C3.2 1456.19,1770.68 1418.39,1808.49 1418.39,1889.24 ; 1359.45,1633.86 1375.91,1633.86 ; 1386.82,1901.12 1406.51,1901.12 1418.39,1889.24
  Bottom Layer w10: v1(786.81,1482.82) v1@863.25,1482.85 ; v1(1014.75,1220.47) 1034.44,1200.79 1395.46,1200.79 1397.51,1198.74 1415.51,1198.74 1417.56,1200.79 1447.82,1200.79 v1(1467.51,1220.47) ; v1(1023.62,1929.13) v1(1259.84,1929.13)
+5L: C1.2 C2.2 J1.1 U1.5 U2.1 U2.3 | length 492.5
  Top Layer w10: J1.1 1117.86,1949.76 C1.2 1128.7,1888.06 ; U1.5 1128.7,1873.06 1128.7,1888.06 ; U2.1 1386.89,1852.49 1386.89,1835.27 1373.44,1821.82 1339.16,1821.82 1331.61,1829.36 1331.61,1833.79 1318.9,1846.5 U2.3 1282.06,1859.3 1260.34,1837.59 C2.2 1259.34,1837.59 1208.87,1888.06 1128.7,1888.06
+5M: C6.2 C8.2 C10.2 U3.5 U4.16 U5.16 | length 1096.7
  Top Layer w19.68: v1(994.09,866.14) C10.2 1001.77,872.85 U5.16 ; v1(1447.82,866.14) 1453.87,872.19 1453.87,935.38 U4.16
  Bottom Layer w19.68: v1(994.09,866.14) 1025.21,897.26 1416.7,897.26 v1(1447.82,866.14) 1504.93,866.14 1733.5,637.58 1734,637.58 1734,578.48 1724.41,568.9 1724.41,562.99 1720.47,559.06 U3.5
+16M: C4.2 C11.2 C12.2 C13.2 C14.2 C15.2 C16.2 C17.2 C18.2 C19.2 C20.2 C21.2 C22.2 C23.2 C24.2 C25.2 J10.1 Q1.1 Q1.2 Q1.3 U3.1 U3.3 U6.4 U7.4 U8.4 | length 2722.9
  Top Layer w19.68: C24.2 649.61,585.58 U8.4 C25.2@875.98,585.58 ; C20.2 984.25,585.58 U7.4 C19.2@1210.63,585.58 ; C15.2 1316.93,587.55 U6.4 1552.11,587.55 v1(1555.12,590.55)
  Bottom Layer w59.06: 639.76,595.42 644.63,590.55 C23.2 v1(767.72,590.55) C21.2 v1(885.83,590.55) v1(964.57,590.55) C18.2 v1(1102.36,590.55) C16.2 v1(1220.47,590.55) v1(1299.21,590.55) C13.2 v1(1437.01,590.55) C11.2 ; C11.2@1515.75,590.55 v1(1555.12,590.55) ; v1@1549.21,586.61 1643.7,492.13 1643.7,442.91 v1(1673.23,413.39) v1(1712.6,413.39) v1(1751.97,413.39) 1751.97,400.56 ; v1@1671.39,413.39 1671.39,336.49 v1(1673.23,334.65) v1(1712.6,334.65) v1(1751.97,334.65) ; v1(1712.6,374.02) v1(1751.97,334.65) ; v1(1751.97,374.02) v1(1751.97,334.65) ; 1811.02,575.02 1851.37,575.02 ; C4.2 1851.37,575.02 ; v1(1751.97,334.65) 1751.97,400.56 ; 1751.97,400.56 1811.05,459.65 1906.3,459.65 1909.45,462.8 Q1.1 Q1.2 1909.45,575.02 1851.37,575.02
  other v1: 1673.23,374.02 692.91,586.61 842.52,586.61 1027.56,586.61 1177.17,586.61 1362.2,586.61 1511.81,586.61 629.92,590.55
LGND: C1.1 C2.1 C3.1 C7.2 C9.2 C26.1 C27.2 C28.2 C29.1 C30.2 C31.2 C32.2 D2.2 J1.5 J13.03 J13.05 J13.09 J14.1 J15.1 J16.1 U1.2 U2.2 U4.2 U4.8 U5.2 U5.8 U9.14 U9.16 U9.32
  other v1: 651.77,1150.58 951.77,1150.58 1104.53,1150.58 1404.53,1150.58 953.75,1220.47 1406.51,1220.47 1163.36,1279.53 669.29,1299.21 1368.11,1338.58 1476.38,1338.58 865.17,1358.27 940.81,1411.36 637.48,1437.01 649.61,1515.75 1368.11,1515.75 1476.38,1535.43 1277.31,1568.84 1397.64,1594.49 649.61,1614.17 1277.31,1631.83 648.23,1664.17 1339.56,1692.91 1249.6,1786.83 1021.46,1830.65 1456.69,1831.68 856.3,1840.55 1356.3,1859.3 570.87,1879.92 1968.5,1899.61 778.53,1929.13 1447.82,1929.13 1821.84,1929.13 1192.7,1956.42 1015.5,2007.82 1604.33,2096.46
M1_Dir: U4.5 U9.8 | length 227.7
  Top Layer w10: U9.8 1219.3,1336.46 1224.16,1331.6 1234.3,1331.6 1240.16,1325.74 1240.16,1240.16 1259.84,1220.47 1259.84,1155.9 U4.5
M1_PWM: U4.4 U9.18 | length 591
  Top Layer w10: U9.18 1187.8,1557.08 1189.06,1555.82 1189.06,1444.8 1287.4,1346.46 1287.4,1180.21 1293.26,1174.35 1299.03,1174.35 1304.53,1168.85 U4.4
M2_Dir: U5.3 U9.3 | length 343.6
  Top Layer w10: U5.3 901.77,1168.85 921.41,1188.5 921.41,1240.84 934.14,1253.56 v1(1059.66,1253.56) ; U9.3 1062.99,1352.17 v1(1062.99,1328.74)
  Bottom Layer w10: v1(1059.66,1253.56) 1061.52,1255.41 1061.52,1327.26 v1(1062.99,1328.74)
M2_PWM: U5.4 U9.19 | length 671
  Top Layer w10: U5.4 851.93,1150.74 851.93,1259.68 v1(852.09,1259.84) ; v1(1006.61,1404.8) 1156.31,1554.49 U9.19
  Bottom Layer w10: v1(852.09,1259.84) 924.57,1332.32 934.13,1332.32 v1(1006.61,1404.8)
M3_Dir: U5.5 U9.2 | length 366.9
  Top Layer w10: U5.5 802.46,1151.27 802.46,1211.91 v1(803.15,1212.6) ; U9.2 1033.46,1350.2 v1(1033.46,1328.74)
  Bottom Layer w10: v1(803.15,1212.6) 858.27,1212.6 974.41,1328.74 v1(1033.46,1328.74)
M3_PWM: U5.6 U9.20 | length 758.4
  Top Layer w10: U5.6 751.77,1295.08 v1(783.46,1326.77) ; v1(984.29,1417.32) 1124.81,1557.84 U9.20
  Bottom Layer w10: v1(783.46,1326.77) 893.74,1326.77 v1(984.29,1417.32)
M_Sleep: U4.6 U9.7 | length 209.7
  Top Layer w10: U9.7 1187.8,1307.8 1204.53,1291.07 U4.6
MGND: C4.1 C5.1 C6.1 C8.1 C10.1 C11.1 C12.1 C13.1 C14.1 C15.1 C16.1 C17.1 C18.1 C19.1 C20.1 C21.1 C22.1 C23.1 C24.1 C25.1 J3.1 J11.1 J12.1 Q1.4 R2.2 R3.1 R4.1 R5.1 R6.1 R7.2 R8.2 R9.1 R10.1 R11.1 R12.1 R13.1 R14.1 R15.1 R16.1 U3.2 U4.9 U4.15 U5.9 U5.15 U6.6 U6.8 U7.6 U7.8 U8.6 U8.8 | length 175.3
  Top Layer w10: v1(791.34,636.81) 792.82,635.33 792.82,622.98 807.5,608.3 U8.8@816.02,608.3 ; v1(1122.05,639.76) 1122.05,637.68 1132.8,626.93 1132.8,617.65 1140.34,610.11 1148.86,610.11 U7.8@1150.67,608.3 ; v1(1452.76,636.81) 1452.76,634.72 1461.3,626.18 1461.3,618.21 1467.44,612.07 U6.8@1480.52,612.07
  Bottom Layer w10: v1(797.24,773.56) R16.1
  other v1: 1830.71,334.65 1870.08,334.65 1909.45,334.65 2007.87,334.65 2047.24,334.65 2086.61,334.65 1830.71,374.02 1870.08,374.02 1909.45,374.02 2007.87,374.02 2047.24,374.02 2086.61,374.02 1271.65,381.89 937.01,385.83 1830.71,413.39 1870.08,413.39 1909.45,413.39 2007.87,413.39 2047.24,413.39 2086.61,413.39 1805.55,514.76 718.5,521.65 767.72,521.55 816.93,521.65 1053.15,521.65 1102.36,521.55 1151.57,521.65 1387.8,521.65 1437.01,521.65 1486.22,521.65 541.34,551.18 1672.26,629.92 1790.37,629.92 1909.45,636.02 1309.06,654.58 1633.86,659.45 639.76,664.42 885.83,664.42 974.41,664.42 1220.47,664.42 1555.12,664.42 2016.74,688.98 954.72,728.35 698.82,773.56 738.19,773.56 1033.46,773.61 1072.83,773.61 1131.89,773.56 1171.26,773.61 1407.48,773.56 1503.94,773.61 1368.11,774.56 1466.54,774.56 679.13,836.61 934.07,866.14 1383.82,866.14 651.77,936.03 951.77,936.03 1104.53,936.03 1404.53,936.03
Motor1_Dir: U4.12 U6.10 | length 484.9
  Top Layer w10: U4.12 1254.53,832.09 1340.93,745.69 1482.62,745.69 1507.95,720.35 1507.95,658.65 1498.86,649.56 U6.10
Motor1_EncA: J14.3 U9.11 | length 917.7
  Top Layer w10: U9.11 1278.32,1475.37 1438.04,1475.37 v1(1439.06,1476.38)
  Bottom Layer w10: v1(1439.06,1476.38) 1437.66,1477.77 1437.66,1713.25 1484.19,1759.78 1484.19,1862.61 1727.89,2106.3 J14.3
Motor1_EncB: J14.4 U9.9 | length 853.9
  Top Layer w10: U9.9 1431.01,1411.36 1436.97,1417.32 v1(1439.06,1417.32)
  Bottom Layer w10: v1(1439.06,1417.32) 1439.06,1419.37 1512.72,1493.03 1512.72,1836.73 J14.4
Motor1_PWM: U4.13 U6.9 | length 610.4
  Top Layer w10: U4.13 1304.53,917.76 1336.1,886.19 1336.1,838.88 1373.55,801.43 1521.4,801.43 1594.49,728.34 1594.49,642.96 1594.49,638.09 1586.27,629.87 U6.9
Motor2_Dir: U5.14 U7.10 | length 546.2
  Top Layer w10: v1(885.83,807.09) 887.91,807.09 893.52,801.48 957.48,801.48 1018.48,740.48 1094.17,740.48 1094.22,740.43 1153.22,740.43 1173.31,720.35 1173.31,656.68 1164.21,647.59 U7.10 ; v1(885.83,885.83) 887.3,887.3 894.15,887.3 901.77,894.92 U5.14
  Bottom Layer w10: v1(885.83,807.09) v1(885.83,885.83)
Motor2_EncA: J15.3 U9.5 | length 849.7
  Top Layer w10: U9.5 1124.81,1479.14 v1(1141.73,1496.06)
  Bottom Layer w10: v1(1141.73,1496.06) 1141.73,1648.22 1281.57,1788.06 1281.57,2029.61 J15.3@1358.27,2106.3
Motor2_EncB: J15.4 U9.6 | length 726.7
  Top Layer w10: U9.6 1156.31,1429.03 1167.32,1440.05 v1(1167.32,1496.06) ; J15.4 J15.4@1329.85,2004.4
  Bottom Layer w10: v1(1167.32,1496.06) 1167.32,1648.54 1299.45,1780.66 1299.45,1919.8 1327.95,1948.31 J15.4
Motor2_PWM: U5.13 U7.9 | length 728.5
  Top Layer w10: U5.13 851.77,871.88 904.29,819.36 1168.83,819.36 1259.85,728.34 1259.85,638.09 1251.05,629.3 1168.65,629.3 1167.33,627.98 1157.56,627.98 U7.9
Motor3_Dir: U5.12 U8.10 | length 346
  Top Layer w10: v1(787.4,807.09) 812.92,807.09 844.57,775.44 844.57,662.59 829.57,647.59 U8.10 ; v1(787.4,885.83) 787.4,887.91 796.27,896.78 796.27,930.53 U5.12
  Bottom Layer w10: v1(787.4,807.09) v1(787.4,885.83)
Motor3_EncA: J16.3 U9.29 | length 726.2
  Top Layer w10: v1(898.2,1615.52) 898.2,1525.14 912.63,1510.71 935.95,1510.71 U9.29
  Bottom Layer w10: J16.3 688.98,1901.57 907.56,1682.99 907.56,1626.97 898.2,1617.61 v1(898.2,1615.52)
Motor3_EncB: J16.4 U9.30 | length 699
  Top Layer w10: v1(885.83,1643.7) 885.83,1641.61 876.47,1632.25 876.47,1515.38 912.63,1479.21 935.95,1479.21 U9.30
  Bottom Layer w10: J16.4 637.8,2005.12 637.8,1858.27 740.46,1755.61 773.92,1755.61 v1(885.83,1643.7)
Motor3_PWM: U5.11 U8.9 | length 479.7
  Top Layer w10: U5.11 751.77,890.72 806.54,835.96 809.33,835.96 864.09,781.19 864.09,756.73 925.2,695.62 925.2,635.15 919.34,629.3 853.99,629.3 852.6,627.9 U8.9
Motor_Sleep: U4.11 U6.3 U7.3 U8.3 | length 1328.7
  Top Layer w10: U8.3@719.41,608.3 721.22,610.11 738.06,610.11 743.92,615.96 743.92,620.77 757.87,634.72 v1(757.87,636.81) ; U7.3@1054.06,608.3 1062.58,608.3 1081.2,626.92 1081.2,635.33 v1(1082.68,636.81) ; v1(1102.36,841.09) 1103.84,839.61 1109.3,839.61 1109.4,839.51 1204.53,839.51 ; U4.11 1204.53,839.51 ; v1(1318.9,728.35) 1262.58,784.67 1259.37,784.67 1204.53,839.51 ; U6.3@1393.55,612.07 1403.41,612.07 1409.27,617.93 1409.27,622.73 1421.26,634.72 v1(1421.26,636.81)
  Bottom Layer w10: v1(757.87,636.81) 759.32,636.81 778.95,656.44 778.95,704.1 820.53,745.69 911.06,745.69 1006.47,841.09 v1(1102.36,841.09) ; v1(1082.68,636.81) 1085.15,639.28 1085.25,639.28 1102.36,656.39 v1(1102.36,841.09) ; v1@1102.36,846.46 v1(1102.36,841.09) ; v1(1318.9,728.35) 1336.85,710.39 1336.85,694.61 1348.76,682.7 1363.66,682.7 1366.07,680.29 1382.64,680.29 1415.85,647.08 1415.85,644.21 1421.26,638.8 v1(1421.26,636.81)
NetC5_2: C5.2 J2.1 Q1.5 | length 141.4
  Bottom Layer w10: v1(2047.24,561.02) Q1.5@2076.77,590.55
  Bottom Layer w31.5: 2077.74,669.29 2077.74,609.26 v1(2086.61,600.39) 2077.74,591.52 2077.74,589.58 Q1.5@2086.61,580.71
  other v1: 2007.87,521.65 2047.24,521.65 2086.61,521.65 2007.87,561.02 2086.61,561.02 2007.87,600.39 2047.24,600.39
NetD1_1: D1.1 R1.1
  other v1: 1466.54,1692.91
NetD1_2: D1.2 U2.4 | length 146.5
  Top Layer w10: U2.4 1318.9,1764.84 1325.71,1771.65 v1(1358.27,1771.65) ; v1(1397.64,1702.76) D1.2
  Bottom Layer w10: v1(1358.27,1771.65) 1358.27,1740.04 1395.55,1702.76 v1(1397.64,1702.76)
NetD2_1: D2.1 R17.1 | length 58.1
  Top Layer w10: D2.1 R17.1
NetJ4_1: J4.1 U6.7
NetJ5_1: J5.1 U6.5
NetJ6_1: J6.1 U7.7
NetJ7_1: J7.1 U8.7
NetJ8_1: J8.1 U7.5
NetJ9_1: J9.1 U8.5
NetR2_1: R2.1 U6.2 | length 66.8
  Top Layer w10: v1(1354.66,660.97) 1356.13,659.49 1356.13,640.37 1366.56,629.95 U6.2@1375.08,629.95
  Bottom Layer w10: v1(1354.66,660.97) 1354.66,660.06 1369.08,645.63 R2.1
NetR3_2: R3.2 U6.14 | length 66.6
  Top Layer w10: v1(1374.75,702.02) 1376.22,700.54 1376.22,694.61 1393.8,677.04 1407.4,677.04 1407.48,676.96 U6.14
  Bottom Layer w10: R3.2 1374.75,705.92 v1(1374.75,702.02)
NetR4_2: R4.2 U6.13 | length 51.1
  Top Layer w10: R4.2 1408.48,712.56 1427.17,693.87 U6.13
NetR5_2: R5.2 U6.12 | length 51.1
  Top Layer w10: U6.12 1446.85,693.87 1465.54,712.56 R5.2
NetR6_2: R6.2 U6.11 | length 62.5
  Top Layer w10: U6.11 v1(1473.43,670.22)
  Bottom Layer w10: v1(1473.43,670.22) 1474.9,671.7 1474.9,684.57 1502.94,712.61 R6.2
NetR7_1: R7.1 U7.2 | length 74.9
  Top Layer w10: v1(1025.38,665.89) 1025.38,663.8 1022.56,660.97 1022.56,637.33 1031.91,627.98 1047.17,627.98 U7.2
  Bottom Layer w10: R7.1 1025.38,650.4 v1(1025.38,665.89)
NetR8_1: R8.1 U8.2 | length 74.9
  Top Layer w10: v1(690.74,665.89) 690.74,663.8 687.91,660.97 687.91,637.33 697.27,627.98 712.52,627.98 U8.2
  Bottom Layer w10: R8.1 690.74,650.4 v1(690.74,665.89)
NetR9_2: R9.2 U7.14 | length 65.3
  Top Layer w10: v1(1065.94,668.26) U7.14
  Bottom Layer w10: R9.2 1034.46,712.61 1064.47,682.61 1064.47,669.73 v1(1065.94,668.26)
NetR10_2: R10.2 U7.13 | length 53.1
  Top Layer w10: R10.2 1073.83,712.61 1092.52,693.93 U7.13
NetR11_2: R11.2 U7.12 | length 53
  Top Layer w10: U7.12 1112.2,693.87 1130.89,712.56 R11.2
NetR12_2: R12.2 U7.11 | length 65.3
  Top Layer w10: U7.11 v1(1138.78,668.26)
  Bottom Layer w10: v1(1138.78,668.26) 1140.26,669.73 1140.26,682.61 1170.26,712.61 R12.2
NetR13_2: R13.2 U8.14 | length 65.2
  Top Layer w10: v1(731.3,668.26) U8.14
  Bottom Layer w10: R13.2 699.82,712.56 729.82,682.56 729.82,669.73 v1(731.3,668.26)
NetR14_2: R14.2 U8.13 | length 53
  Top Layer w10: R14.2 739.19,712.56 757.87,693.87 U8.13
NetR15_2: R15.2 U8.12 | length 53
  Top Layer w10: U8.12 777.56,693.87 796.24,712.56 R15.2
NetR16_2: R16.2 U8.11 | length 65.2
  Top Layer w10: U8.11 v1(804.13,668.26)
  Bottom Layer w10: v1(804.13,668.26) 805.61,669.73 805.61,682.56 835.61,712.56 R16.2
NetR17_2: R17.2 U9.31 | length 127.6
  Top Layer w10: v1(915.35,1446.85) 916.83,1445.37 938.3,1445.37 U9.31
  Bottom Layer w10: v1(818.9,1437.01) 884.17,1437.01 892.54,1445.37 913.88,1445.37 v1(915.35,1446.85)
NRST: C27.1 J13.10 U9.4 | length 578.1
  Top Layer w10: J13.10 808.46,1484.61 821.6,1471.47 832.64,1471.47 845.78,1458.34 845.78,1415.68 832.64,1402.54 832.64,1332.71 885.83,1279.53 C27.1 1093.31,1288.58 1093.31,1289.08 U9.4
SWCLK: J13.04 U9.24 | length 210.9
  Top Layer w10: J13.04 875.57,1664.17 879.49,1668.1 993.97,1668.1 998.82,1672.96 U9.24
SWDIO: J13.02 U9.23 | length 258.3
  Top Layer w10: J13.02 928.55,1714.17 943.85,1729.47 1014.02,1729.47 1025.46,1718.03 1025.46,1694.71 U9.23
Throw_PWM: U4.3 U9.25 | length 682.4
  Top Layer w10: U9.25 945.67,1626.98 971.45,1626.98 v1(1062.99,1535.43) ; U4.3 1356.79,1152.84 1356.79,1258.37 v1(1358.27,1259.84)
  Bottom Layer w10: v1(1062.99,1535.43) 1337.11,1261.32 1356.79,1261.32 v1(1358.27,1259.84)
Thrower_PWM: J11.2 U4.14 | length 539
  Top Layer w10: U4.14 1354.53,845.73 1367.09,833.17 1764.89,833.17 1781.13,816.93 J11.2
USB_Data_N: J1.2 U1.4 U9.21 | length 362.8
  Top Layer w10.24: J1.2 1089.52,2005.06 1089.52,1981.35 1088.53,1980.37 1088.53,1899.47 1089.52,1898.49 1089.52,1823.87 1115.25,1798.13 1119.08,1798.13 1120.13,1797.08 U1.4@1120.13,1793.25 ; U9.21 1088.57,1694.59 1088.57,1715.52 1086.62,1717.48 1086.62,1755.91 1123.96,1793.25 U1.4
USB_Data_P: J1.3 U1.3 U9.22 | length 364.6
  Top Layer w10.24: U1.3 U1.3@1036.96,1793.25 ; U9.22 1066.56,1694.59 1066.56,1715.52 1068.51,1717.48 1068.51,1761.7 U1.3@1036.96,1793.25 ; J1.3 1069.44,2005.06 1069.44,1981.35 1070.42,1980.37 1070.42,1891.97 1071.41,1890.99 1071.41,1819.44 1050.1,1798.13 1041.84,1798.13 U1.3@1036.96,1793.25
pads on no net: J1.4 J1.S1 J1.S2 J1.S3 J1.S4 J1.S5 J1.S6 J11.3 J11.4 J11.drill J13.06 J13.07 J13.08 J14.drill J15.drill J16.drill U1.1 U3.4 U4.7 U4.10 U5.7 U5.10 U6.1 U7.1 U8.1 U9.10 U9.12 U9.13 U9.26 U9.27 U9.28

## Polygon pours and split planes (outlines as drawn)
NetJ4_1 on Top Layer "NETJ4_1_L01_P004" (solid, pour order 4): 1456.69,434.39 1456.69,316.28 1574.8,316.28 1574.8,434.39 1594.49,454.07 1594.49,572.18 1437.01,572.18 1437.01,542.65 1515.75,542.65 1515.75,483.6
NetJ6_1 on Top Layer "NETJ6_1_L01_P006" (solid, pour order 6): 1122.05,431.76 1122.05,313.65 1240.16,313.65 1240.16,431.76 1259.84,451.44 1259.84,569.55 1102.36,569.55 1102.36,540.02 1181.1,540.02 1181.1,480.97
NetJ8_1 on Top Layer "NETJ8_1_L01_P008" (solid, pour order 8): 1082.68,431.76 1082.68,313.65 964.57,313.65 964.57,431.76 944.88,451.44 944.88,569.55 1102.36,569.55 1102.36,540.02 1023.62,540.02 1023.62,480.97
NetJ5_1 on Top Layer "NETJ5_1_L01_P009" (solid, pour order 9): 1417.32,434.39 1417.32,316.28 1299.21,316.28 1299.21,434.39 1279.53,454.07 1279.53,572.18 1437.01,572.18 1437.01,542.65 1358.27,542.65 1358.27,483.6
NetJ9_1 on Top Layer "NETJ9_1_L01_P000" (solid, pour order 0): 748.03,433.07 748.03,314.96 629.92,314.96 629.92,433.07 610.24,452.76 610.24,570.87 767.72,570.87 767.72,541.34 688.98,541.34 688.98,482.28
NetJ7_1 on Top Layer "NETJ7_1_L01_P007" (solid, pour order 7): 787.4,433.07 787.4,314.96 905.51,314.96 905.51,433.07 925.2,452.76 925.2,570.87 767.72,570.87 767.72,541.34 846.46,541.34 846.46,482.28
LGND on GND Plane 1 (split plane): 2145.26,2016.2 2019.23,1890.18 1594.49,1890.18 1590.57,1889.79 1586.8,1888.65 1583.32,1886.79 1580.28,1884.29 1521.22,1825.23 1518.72,1822.19 1516.87,1818.71 1515.72,1814.94 1515.34,1811.02 1515.34,1122.14 590.96,1122.14 590.96,1751.97 590.58,1755.89 589.43,1759.66 587.58,1763.13 585.08,1766.18 335.06,2016.2 335.06,2164.94 2145.26,2164.94
MGND on GND Plane 1 (split plane): 1515.34,944.88 1515.72,940.96 1516.87,937.19 1518.72,933.72 1521.22,930.67 1580.28,871.62 1583.32,869.12 1586.8,867.26 1590.57,866.12 1594.49,865.73 2019.23,865.73 2145.26,739.71 2145.26,295.69 335.06,295.69 335.06,444.43 585.08,694.45 587.58,697.5 589.43,700.97 590.58,704.74 590.96,708.66 590.96,964.47 1515.34,964.47
LGND on GND Plane 2 (split plane): 2145.26,2016.2 2019.23,1890.18 1594.49,1890.18 1590.57,1889.79 1586.8,1888.65 1583.32,1886.79 1580.28,1884.29 1521.22,1825.23 1518.72,1822.19 1516.87,1818.71 1515.72,1814.94 1515.34,1811.02 1515.34,1122.14 590.96,1122.14 590.96,1751.97 590.58,1755.89 589.43,1759.66 587.58,1763.13 585.08,1766.18 335.06,2016.2 335.06,2164.94 2145.26,2164.94
MGND on GND Plane 2 (split plane): 1515.34,944.88 1515.72,940.96 1516.87,937.19 1518.72,933.72 1521.22,930.67 1580.28,871.62 1583.32,869.12 1586.8,867.26 1590.57,866.12 1594.49,865.73 2019.23,865.73 2145.26,739.71 2145.26,295.69 335.06,295.69 335.06,444.43 585.08,694.45 587.58,697.5 589.43,700.97 590.58,704.74 590.96,708.66 590.96,964.47 1515.34,964.47

## Keep-outs
Keep-Out Layer:
  circle w10: c433.07,393.7 r118.11
  circle w10: c433.07,2066.93 r118.11
  circle w10: c2047.24,2066.93 r118.11
  lines w19.68: 314.96,275.59 2165.35,275.59 2165.35,748.03 2027.56,885.83 1594.49,885.83 1535.43,944.88 1535.43,1811.02 1594.49,1870.08 2027.56,1870.08 2165.35,2007.87 2165.35,2185.04 314.96,2185.04 314.96,2007.87 570.87,1751.97 570.87,708.66 314.96,452.76 314.96,275.59

## Other copper
GND Plane 1 (plane layer: these items are gaps in the copper):
  lines w157.48: 570.39,1043.31 1527.09,1043.31
GND Plane 2 (plane layer: these items are gaps in the copper):
  lines w157.48: 574.8,1043.31 1523.62,1043.31

## Silkscreen, mask and mechanical layers (free items; w line width, h text height)
Top Overlay:
  text "ENC2" at 1484.82,1911.63 h39.37
  text "ENC1" at 1870.24,1909.61 h39.37
  text "ENC3" at 531.65,1899.76 h39.37
  text "BAT+" at 1998.19,639.92 h39.37
  text "THRW PWM" at 1655.26,612.42 h39.37
  text "THRW+" at 1594.65,454.23 h39.37
  text "THRW-" at 1791.5,452.91 h39.37
  text "BAT-" at 1998.19,452.91 h39.37
  text "M3-" at 620.24,443.07 h39.37
  text "M3+" at 817.09,443.07 h39.37
  text "M2-" at 954.88,443.07 h39.37
  text "M2+" at 1151.73,443.07 h39.37
  text "M1-" at 1279.68,443.07 h39.37
  text "M1+" at 1476.54,443.07 h39.37
Board Shape:
  lines w19.68: 314.96,275.59 797.24,275.59 1722.44,275.59 2165.35,275.59 2165.35,748.03 2027.56,885.83 1594.49,885.83 1535.43,944.88 1535.43,1811.02 1594.49,1870.08 2027.56,1870.08 2165.35,2007.87 2165.35,2185.04 314.96,2185.04 314.96,2007.87 570.87,1751.97 570.87,708.66 314.96,452.76 314.96,275.59

## Text inside footprints (layer, text, board x,y; h text height)
J1: Mechanical 13 "PCB END" at 879.67,2164.31 h16 r180
U1: Top Overlay "*" at 995.46,1885.65 h50; Mechanical 13 "*" at 1044.46,1840.06 h50
U4: Top Overlay "*" at 1470.53,1173.08 h50 r270; Mechanical 13 "*" at 1421.53,1119.31 h50 r270
U5: Top Overlay "*" at 1017.77,1173.08 h50 r270; Mechanical 13 "*" at 968.77,1119.31 h50 r270
U9: Top Overlay "*" at 993.08,1289.1 h50 r90; Mechanical 13 "*" at 1008.08,1382.6 h50 r90